# Altium PCB KBUS_to_TTL.PcbDoc
Units mil, origin at the board's own origin, x right, y up, seen from the top; angles counter-clockwise.
Board outline 6000 x 4000 mil, 2 copper layers (Top Layer, Bottom Layer); 35 components, 23 nets, 179 pads, 0 vias.
Unrouted connection lines stored in the file: 62.
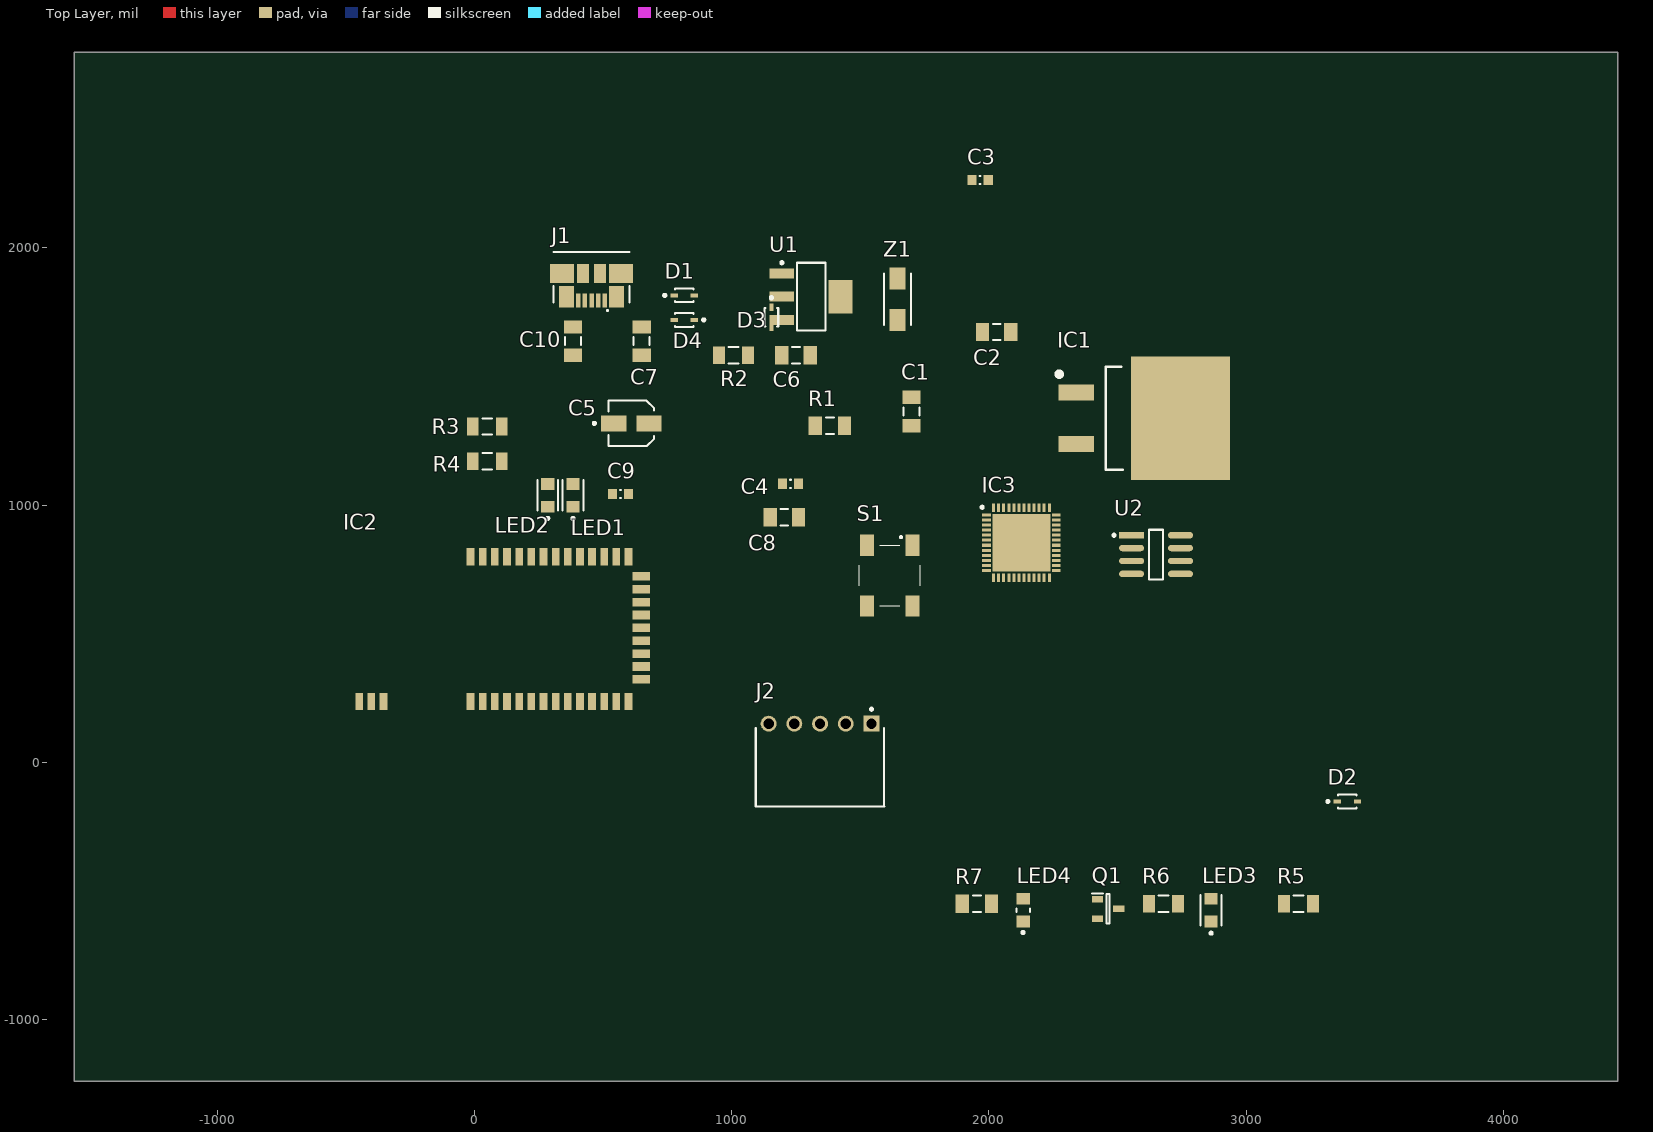
[diagram p0: Top Layer view]
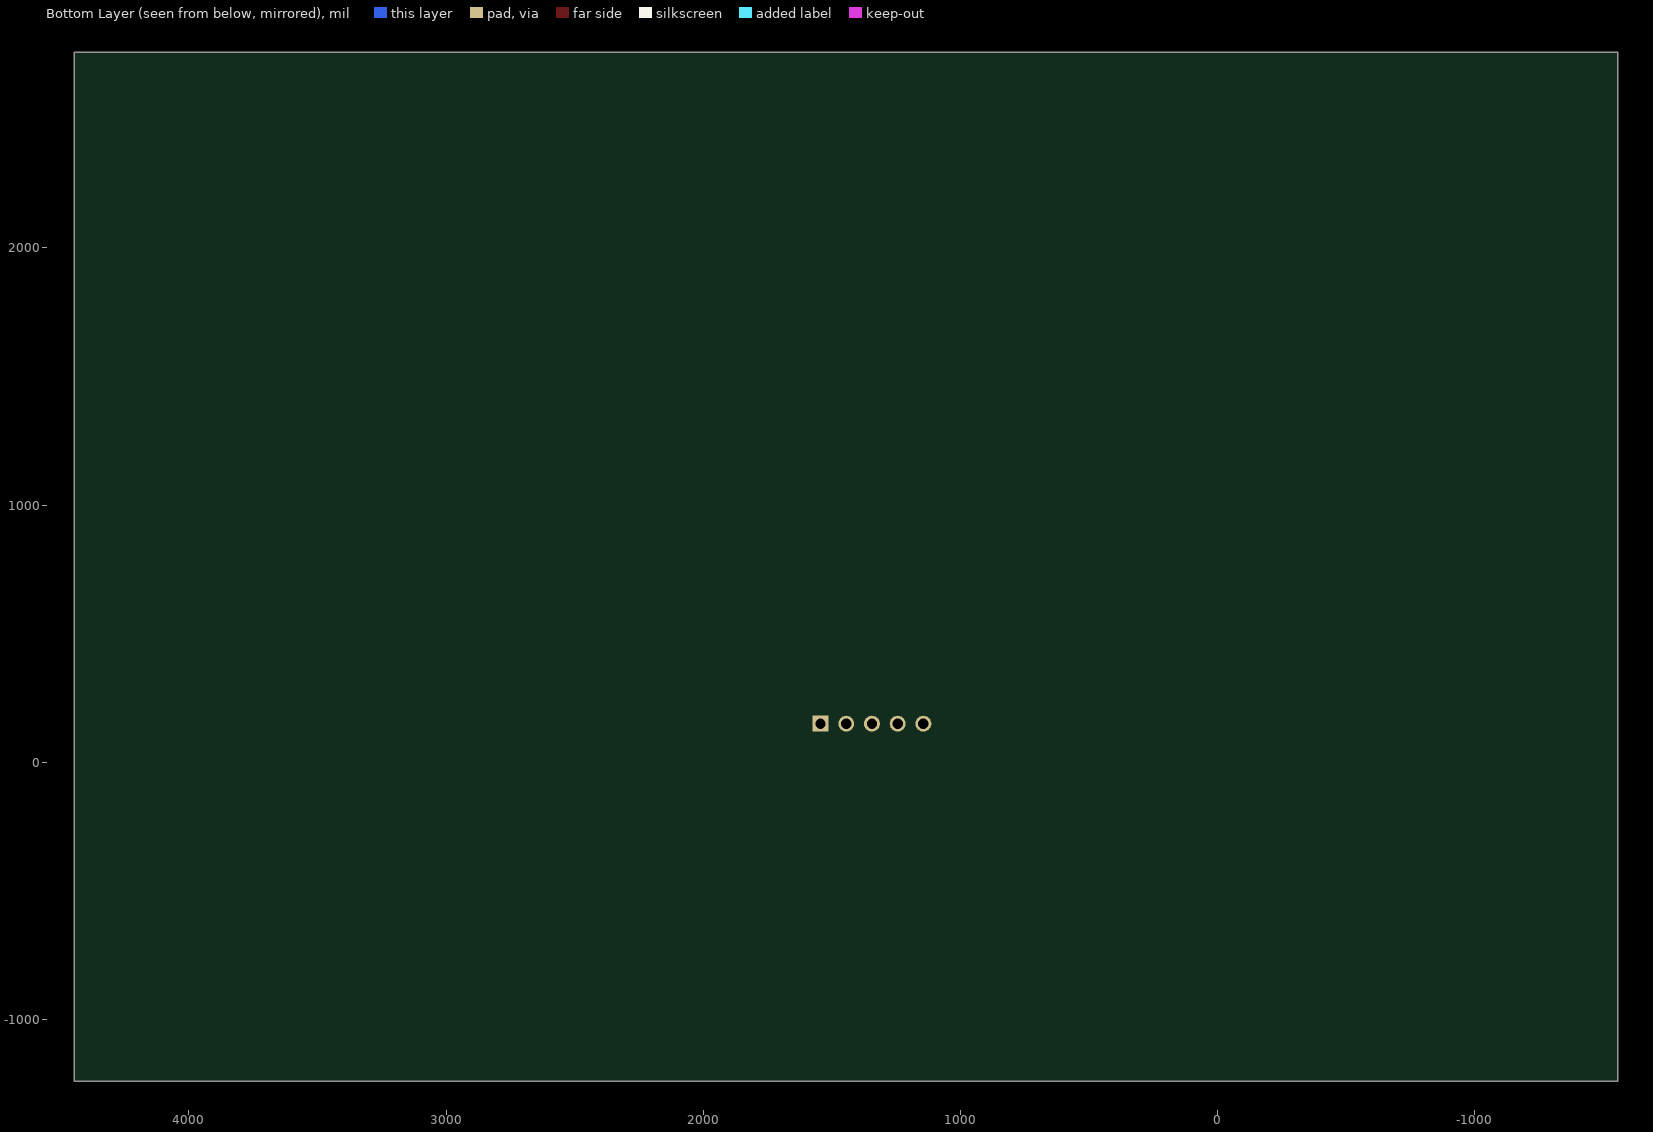
[diagram p1: Bottom Layer view, seen from below]

## Layer stack, top to bottom
Top Solder: solder mask 0.4, Solder Resist, Dk 3.5
Top Layer: signal copper 1.4
Dielectric 1: dielectric 12.6, FR-4, Dk 4.8
Bottom Layer: signal copper 1.4
Bottom Solder: solder mask 0.4, Solder Resist, Dk 3.5

## Board outline
-1555,-1240 4445,-1240 4445,2760 -1555,2760

## Design rules (kind name [scope] priority, off if disabled: settings)
Clearance [All] p1: gap=1 ignorepadtopadclearanceinfootprint=FALSE except(0: Via-Hole Fill-Hole Poly-Hole Region-Hole Text-Hole)
MinimumSolderMaskSliver [All] p1: minsoldermaskwidth=1
PasteMaskExpansion [All] p1: expansion=-0.1
PolygonConnect [All] p1: connectstyle=Relief reliefconductorwidth=10 reliefentries=4 polygonreliefangle="90 Angle" airgapwidth=10
RoomDefinition KBUS_to_TTL [InComponentClass('KBUS_to_TTL')] p1: confinementstyle=ConfineIn formatcopy=TRUE lockcomponents=FALSE outline -1539.57,-1252.51 4430.43,-1252.51 4430.43,2767.49 -1539.57,2767.49
RoutingVias [All] p1: holewidth=28 width=50 viastyle="Through Hole" minholewidth=28 minwidth=50 maxholewidth=28 maxwidth=50
SilkToSolderMaskClearance [IsPad] p1: minsilkscreentomaskgap=1 clearancetoexposedcopper=TRUE
SolderMaskExpansion [All] p1: expansion=4 istentingtop=FALSE
Width [All] p1: maxlimit=1 minlimit=0.2 preferedwidth=0.3 minimp=50.000000 maximp=50.000000 favimp=50.000000
27 further rules are at their usual default settings.

## Classes and differential pairs
component class KBUS_to_TTL: C1 C2 C4 C5 C6 C7 C8 C9 C10 D1 D4 IC1 IC2 IC3 J1 LED1 LED2 LED3 LED4 Q1 R1 R2 R3 R4 R5 R6 R7 S1 U1 U2 Z1

## Components (designator, comment, footprint, x,y, rotation, side; value= is the part's Value field where it differs from the comment)
C1 "330nF" KEMET_C1206C-EB_IPC_B 1699.61,1363.46 r90 top
C2 "100nF" KEMET_C1206C-EB_IPC_B 2030.58,1672.49 r0 top
C3 "10uF" CAPC1608N 1966.5,2263.38 r0 top
C4 "10uF" CAPC1608N 1228.94,1082.49 r0 top
C5 "1uF" Panasonic_SB_MFG 610.43,1317.49 r0 top
C6 "100nF" KEMET_C1206C-EB_IPC_B 1250.58,1582.34 r0 top
C7 "100nF" KEMET_C1206C-EB_IPC_B 650.43,1637.49 r90 top
C8 "100nF" KEMET_C1206C-EB_IPC_B 1205.28,952.49 r0 top
C9 "10uF" CAPC1608N 568.03,1042.49 r0 top
C10 "100nF" KEMET_C1206C-EB_IPC_B 383.8,1637.49 r90 top
D1 "1N4148" Diodes_Inc._SOD323F_MFG 816.14,1815 r0 top
D2 "1N4148" Diodes_Inc._SOD323F_MFG 3393.74,-152.49 r0 top
D3 "1N4148" Diodes_Inc._SOD323F_MFG 1155,1730 r270 top
D4 "1N4148" Diodes_Inc._SOD323F_MFG 816.14,1719.45 r180 top
IC1 "L7805ABD2T-TR" D2PAK-STB35NF10T4 2455.24,1136.7 r180 top
IC2 "BM20SPKA1NBC-0001AA" BM20SPKA1NBC0001AA 91.66,517.77 r90 top
IC3 "STM32G0 Modified" QFN50P700X700X60-49N-D 2127.01,853.54 r0 top
J1 "47346-0001" 47346-0001 455.81,1984.37 r0 top
J2 "SWD" Tyco_640455-5_0 1344.17,-20 r180 top
LED1 "5988170107F" Dialight_0_MFG 383.8,1037.49 r90 top
LED2 "5988170107F" Dialight_0_MFG 285.43,1037.49 r90 top
LED3 "POWER LED GREEN" Dialight_0_MFG 2864.17,-575 r90 top
LED4 "ERROR LED RED" Dialight_598_0 2134.17,-575 r90 top
Q1 "BSN20-7" SOT96P240X110-3N 2464.17,-570 r0 top
R1 "100R" RESC3216N 1382.52,1308.32 r0 top
R2 "510R" Vishay_CRCW1206-e3_IPC_B 1007.68,1582.34 r0 top
R3 "510R" Vishay_CRCW1206-e3_IPC_B 50.32,1305.71 r0 top
R4 "510R" Vishay_CRCW1206-e3_IPC_B 50.32,1170 r0 top
R5 "510R" Vishay_CRCW1206-e3_IPC_B 3204.17,-550 r0 top
R6 "510R" Vishay_CRCW1206-e3_IPC_B 2679.17,-550 r0 top
R7 "1M" RESC3216N 1954.17,-550 r0 top
S1 "LL3301AF065QJ" LL3301FF065QJ 1615.43,725.59 r270 top
U1 "LM1117MP-3.3/NOPB" MP04A_N 1309.61,1810 r0 top
U2 "E-L9637D013TR" STMicroelectronics_SO8-0016023_IPC_A 2650.31,807.49 r0 top
Z1 "SML4747AHE3_A_H" DIONM5127X229N 1645.43,1800.16 r90 top

## Footprints (in the part's own frame and the unit in brackets; to place one, negate y for a bottom-side part, rotate by r counter-clockwise, add the part's x,y. Pads: shape width x height; smd on the part's side, far side on the other; paste and mask are expansions set on the pad)
47346-0001 [mm]
  rect 0.45x1.38 smd: 1(1.3,-4.81) 2(0.65,-4.81) 3(0,-4.81) 4(-0.65,-4.81) 5(-1.3,-4.81)
  rect 1.475x2.1 smd: 6(-2.452,-4.45) 7(2.452,-4.45)
  rect 1.175x1.9 smd: 8(0.837,-2.15) 9(-0.837,-2.15)
  rect 2.375x1.9 smd: 10(2.913,-2.15) 11(-2.913,-2.15)
  silkscreen extent -3.75,-5.84 3.75,0, body extent -3.9,-5 3.9,0, height 2.66
BM20SPKA1NBC0001AA [mil]
  rect 66.93x29.92 smd: 1(-281.5,106.3) 2(-281.5,59.06) 3(-281.5,11.81) 4(-281.5,-35.43) 5(-281.5,-82.68) 6(-281.5,-129.92) 7(-281.5,-177.17) 8(-281.5,-224.41) 9(-281.5,-271.65) 10(-281.5,-318.9) 11(-281.5,-366.14) 12(-281.5,-413.39) 13(-281.5,-460.63) 14(-281.5,-507.87) 24(281.5,-507.87) 25(281.5,-460.63) 26(281.5,-413.39) 27(281.5,-366.14) 28(281.5,-318.9) 29(281.5,-271.65) 30(281.5,-224.41) 31(281.5,-177.17) 32(281.5,-129.92) 33(281.5,-82.68) 34(281.5,-35.43) 35(281.5,11.81) 36(281.5,59.06) 37(281.5,106.3) 38(-281.5,539.37) 39(-281.5,492.13) 40(-281.5,444.88)
  rect 33.46x66.93 smd: 15(-195.28,-557.09) 16(-145.28,-557.09) 17(-95.28,-557.09) 18(-45.28,-557.09) 19(4.72,-557.09) 20(54.72,-557.09) 21(104.72,-557.09) 22(154.72,-557.09) 23(204.72,-557.09)
  body extent -295,-571 295,571, height 102
CAPC1608N [mm] "Chip Capacitor, Body 1.6x0.8mm, Height 0.55mm, IPC Medium Density"
  rect 0.9x1 smd: 1(-0.8,0) 2(0.8,0)
  silkscreen extent -0.05,-0.4 0.05,0.4, body extent -0.8,-0.4 0.8,0.4, height 0.54
D2PAK-STB35NF10T4 [mm]
  rect 3.5x1.6 smd: 1(2.904,-7.64) 3(2.904,-2.56)
  rect 9.75x12.2 smd: 4(-7.371,-5.1)
  silkscreen extent -1.64,-10.2 4.82,0, body extent -11.64,-10.28 4.25,0.08, height 4.6
Dialight_0_MFG [mm]
  rect 1.15x1.3 smd paste+0 mask+0: 1(-1.125,0) 2(1.125,0)
  silkscreen extent -2.4,-1.02 1.5,1.02, body extent -1.8,-0.77 1.8,0.77, height 0.25
Dialight_598_0 [mm]
  rect 1.15x1.3 smd paste+0 mask+0: 1(-1.125,0) 2(1.125,0)
  silkscreen extent -2.32,-0.67 0.18,0.67, body extent -1.8,-0.77 1.8,0.77, height 0.25
Diodes_Inc._SOD323F_MFG [mm]
  rect 0.71x0.403 smd paste+0 mask+0: 1(-0.995,0) 2(0.995,0)
  silkscreen extent -2.05,-0.67 0.9,0.67, body extent -1.45,-0.77 1.45,0.77, height 0.25
DIONM5127X229N [mm]
  rect 2.2x1.55 smd: 1(-2.05,0) 2(2.05,0)
  silkscreen extent -2.55,-1.33 2.55,1.33, body extent -2.55,-1.33 2.55,1.33, height 2.29
KEMET_C1206C-EB_IPC_B [mil]
  rect 51.36x71.11 smd paste+0 mask+0: 1(-55.15,0) 2(55.15,0)
  silkscreen extent -15,-31 15,31, body extent -91,-45 91,45, height 10
LL3301FF065QJ [mm]
  rect 2.1x1.4 smd: 1(-3,2.25) 2(3,2.25) 3(-3,-2.25) 4(3,-2.25)
  silkscreen extent -3.9,-3 3,3, body extent -3.3,-3 3.3,3, height 5.3
MP04A_N [mm] "SOT223, 4-Leads, Body 6.5x3.5mm, Pitch 2.3mm, Lead Span 7mm, IPC Medium Density"
  rect 2.4x1 smd: 1(-2.9,2.3) 2(-2.9,0) 3(-2.9,-2.3)
  rect 2.4x3.3 smd: 4(2.9,0)
  silkscreen extent -3.02,-3.35 1.4,3.47, body extent -1.86,-3.35 1.86,3.35, height 1.8
Panasonic_SB_MFG [mm]
  rect 2.5x1.6 smd paste+0 mask+0: 1(-1.75,0) 2(1.75,0)
  silkscreen extent -3.77,-2.25 2.25,2.25, body extent -3.25,-2.5 3.25,2.5, height 0.25
QFN50P700X700X60-49N-D [mm]
  rect 0.85x0.3 smd: 1(-3.45,2.75) 2(-3.45,2.25) 3(-3.45,1.75) 4(-3.45,1.25) 5(-3.45,0.75) 6(-3.45,0.25) 7(-3.45,-0.25) 8(-3.45,-0.75) 9(-3.45,-1.25) 10(-3.45,-1.75) 11(-3.45,-2.25) 12(-3.45,-2.75) 25(3.45,-2.75) 26(3.45,-2.25) 27(3.45,-1.75) 28(3.45,-1.25) 29(3.45,-0.75) 30(3.45,-0.25) 31(3.45,0.25) 32(3.45,0.75) 33(3.45,1.25) 34(3.45,1.75) 35(3.45,2.25) 36(3.45,2.75)
  rect 0.3x0.85 smd: 13(-2.75,-3.45) 14(-2.25,-3.45) 15(-1.75,-3.45) 16(-1.25,-3.45) 17(-0.75,-3.45) 18(-0.25,-3.45) 19(0.25,-3.45) 20(0.75,-3.45) 21(1.25,-3.45) 22(1.75,-3.45) 23(2.25,-3.45) 24(2.75,-3.45) 37(2.75,3.45) 38(2.25,3.45) 39(1.75,3.45) 40(1.25,3.45) 41(0.75,3.45) 42(0.25,3.45) 43(-0.25,3.45) 44(-0.75,3.45) 45(-1.25,3.45) 46(-1.75,3.45) 47(-2.25,3.45) 48(-2.75,3.45)
  rect 5.7x5.7 smd: 49(0,0)
  silkscreen extent -4,3.38 -3.75,3.62, body extent -3.55,-3.55 3.55,3.55, height 0.6
RESC3216N [mm] "Chip Resistor, Body 3.2x1.6mm, IPC Medium Density"
  rect 1.3x1.8 smd: 1(-1.45,0) 2(1.45,0)
  silkscreen extent -0.4,-0.8 0.4,0.8, body extent -1.68,-0.87 1.68,0.87, height 0.71
SOT96P240X110-3N [mm]
  rect 1.1x0.65 smd: 1(-1.05,0.96) 2(-1.05,-0.96) 3(1.05,0)
  silkscreen extent -1.6,-1.45 0.15,1.54, body extent -1.2,-1.45 1.2,1.45, height 1.1
STMicroelectronics_SO8-0016023_IPC_A [mil]
  rect 97.4x24.49 smd paste+0 mask+0: 1(-95.12,75)
  rrect100% 97.4x24.49 smd paste+0 mask+0: 2(-95.12,25) 3(-95.12,-25) 4(-95.12,-75) 5(95.12,-75) 6(95.12,-25) 7(95.12,25) 8(95.12,75)
  silkscreen extent -168,-96 27,96, body extent -164,-116 164,116, height 10
Tyco_640455-5_0 [mm]
  rect 1.57x1.57 hole 1.02 paste-1000 mask+0: 1(-5.08,-4.32)
  round 1.57 hole 1.02 paste-1000 mask+0: 2(-2.54,-4.32) 3(0,-4.32) 4(2.54,-4.32) 5(5.08,-4.32)
  silkscreen extent -6.35,-5.87 6.35,3.88, body extent -6.52,-5.21 6.52,7.01, height 0.25
Vishay_CRCW1206-e3_IPC_B [mil]
  rect 45.51x69.22 smd paste+0 mask+0: 1(-56.14,0) 2(56.14,0)
  silkscreen extent -19,-31 19,31, body extent -89,-44 89,44, height 10

## Part data
C1: library part C1206C334K3RACTU, "Kemet C1206, 330nF, 25VDC, X7R"
C2 C6 C7 C8 C10: library part C1206C104M5RACTU, "Kemet C1206, 100nF, 50VDC, X7R"
C3 C4 C9: "CAP MLCC, 10uF, 16V, 0603 [1608 Metric], ±10%, X5R", Dielectric=X5R, Manufacturer=MURATA, Manufacturer Part Number=GRM188R61C106KAALD, Package="0603 [1608 Metric]", Supplier Part Number 1=2611923, Tolerance="± 10%", Voltage=16V, ComponentLink1Description=Datasheet, ComponentLink1URL=https://4donline.ihs.com/images/VipMasterIC/IC/MURE/MURE-S-A0004349797/MURE-S-A0004352506-1.pdf?hkey=6D3A4C79FDBF58556ACFDE234799DDF0, Mounting=SMD, Part Type=MLCC, Supplier 1=Farnell
C5: library part EEE1HA010SR, "1uF electrolytic capacitor"
D1 D2 D3 D4: library part 1N4148WSF-7
IC1: "Integrated Circuit", Manufacturer_Name=STMicroelectronics, Datasheet Link=https://www.st.com/resource/en/datasheet/l78.pdf, Manufacturer_Part_Number=L7805ABD2T-TR
IC2: "Bluetooth Module, Class 2, BLE 5.0", Manufacturer=Microchip, Supplier Part Number=3580727, ComponentLink1Description=Datasheet, ComponentLink1URL=https://4donline.ihs.com/images/VipMasterIC/IC/MCHP/MCHP-S-A0008919503/MCHP-S-A0008920188-1.pdf?hkey=6D3A4C79FDBF58556ACFDE234799DDF0, Manufacturer Part Number=BM20SPKA1NBC-0001AA, Mounting=SMD, Supplier 1=Farnell
IC3: "Integrated Circuit", Manufacturer=STMicroelectronics, Manufacturer Part Number=STM32G071CBU6, Supplier Part Number=511-STM32G071CBU6, ComponentLink1Description=Datasheet, ComponentLink1URL=https://www.mouser.co.uk/datasheet/2/389/dm00412180-1799303.pdf, Supplier 1=Mouser
J1: "Connector", Manufacturer_Name=Molex, Mouser Part Number=538-47346-0001, Datasheet Link=http://www.molex.com/pdm_docs/sd/473460001_sd.pdf, Manufacturer_Part_Number=47346-0001, Mouser Price/Stock=https://www.mouser.co.uk/ProductDetail/Molex/47346-0001?qs=c2CV6XM0DweJBWaSeyWeCw%3D%3D
J2: library part 640455-5, "ST-LINK"
LED1 LED2: "Green LED", Manufacturer=DIALIGHT, Supplier Part Number=1465996, ComponentLink1Description=Datasheet, ComponentLink1URL=https://www.farnell.com/datasheets/1484480.pdf, Manufacturer Part Number=5988170107F, Mounting=SMD, Supplier 1=Farnell
LED3: library part 5988170107F, "Green LED", Manufacturer=DIALIGHT, Supplier Part Number=1465996, ComponentLink1Description=Datasheet, ComponentLink1URL=https://www.farnell.com/datasheets/1484480.pdf, Manufacturer Part Number=5988170107F, Mounting=SMD, Supplier 1=Farnell
LED4: library part 598-8110-107F, "Red LED", Manufacturer=DIALIGHT, Manufacturer Part Number=5988110107F, Supplier Part Number=1465992, ComponentLink1Description=Datasheet, ComponentLink1URL=https://www.farnell.com/datasheets/1484480.pdf, Mounting=SMD, Supplier 1=Farnell
Q1: "MOSFET (N-Channel)", Manufacturer="DIODES INC", Supplier Part Number=621-BSN20-7, ComponentLink1Description=Datasheet, ComponentLink1URL=https://www.diodes.com/assets/Datasheets/ds31898.pdf, Manufacturer Part Number=BSN20-7, Mounting=SMD, Supplier 1=Mouser
R1: "RES 100R, ±1%, 250mW, 200V, 1206 [3216 Metric], Thick Film", Manufacturer=YAGEO, Manufacturer Part Number=RC1206FR-07100RL, Package="1206 [3216 Metric]", Power=250mW, Supplier Part Number 1=9240888, Temperature Coefficient="± 100ppm/°C", Tolerance="± 1%", Voltage=200V, ComponentLink1Description=Datasheet, ComponentLink1URL=http://www.farnell.com/datasheets/2167052.pdf, Mounting=SMD, Part Type="Thick Film", Supplier 1=Farnell
R2 R3 R4 R5 R6: library part CRCW1206510RJNEA, "Resistor 1206, 510ohm, 5%, 1/4W"
R7: "RES 1M, ±0,1%, 125mW, 150V, 1206 [3216 Metric], Thin Film", Manufacturer="MULTICOMP PRO", Manufacturer Part Number=MC009412, Package="1206 [3216 Metric]", Power=125mW, Supplier Part Number 1=2988394, Tolerance="± 0,1%", Voltage=150V, ComponentLink1Description=Datasheet, ComponentLink1URL=https://www.farnell.com/datasheets/2861105.pdf, Mounting=SMD, Part Type="Thin Film", Supplier 1=Farnell
S1: "Switch", Manufacturer_Name=E-Switch, Datasheet Link=https://media.digikey.com/pdf/Data%20Sheets/E-Switch%20PDFs/LL3301AF065QJ.pdf, Height=7.3mm, Manufacturer_Part_Number=LL3301AF065QJ
U1: "800mA Low-Dropout Linear Regulator, 4-pin SOT-223, Pb-Free", Manufacturer="National Semiconductor", PackageTopMarking=XYTT*N05A, PowerWise=N, Code_IPC=SOT223-4, Code_JEDEC=TO-261-AA, ComponentLink1Description="LM1117 Datasheet", ComponentLink1URL=http://www.national.com/ds/LM/LM1117.pdf, ComponentLink2Description="LM1117 Web Page", ComponentLink2URL=http://www.national.com/pf/LM/LM1117.html, ComponentLink3Description="MP04A Package Page", ComponentLink3URL=http://www.national.com/packaging/folders/mp04a.html, CompType="LDO IC", DatasheetVersion=Apr-2006, PackageDescription="Molded SOT-223, 6.50 x 3.56 x 1.6mm Body, 4 Lead, 2.3mm Pitch", PackageReference=MP04A, PackageVersion="revB, Apr-2003", PartNumber=LM1117MP-3.3/NOPB, PinCount=4, RevisionNote="Component URLs added", RoHS=Y
U2: "Bidirectional Serial Communication in Automotive Diagnostic System", Manufacturer=STMicroelectronics, Supplier Part Number=3130050, ComponentLink1Description=Datasheet, ComponentLink1URL=https://www.farnell.com/datasheets/2815827.pdf, Manufacturer Part Number=E-L9637D013TR, Mounting=SMD, Supplier 1=Farnell
Z1: "Zener Diode", Manufacturer=Vishay, Manufacturer Part Number=SML4747AHE3_A/H, Supplier Part Number=3818758, Voltage=20V, ComponentLink1Description=Datasheet, ComponentLink1URL=https://4donline.ihs.com/images/VipMasterIC/IC/VISH/VISH-S-A0012939441/VISH-S-A0013145027-1.pdf?hkey=6D3A4C79FDBF58556ACFDE234799DDF0, Supplier 1=Farnell

## Nets (pads, with @x,y where several pads share a name; then routed paths per layer and width w, separated by ;. In a path a pad name is that pad's centre, name@x,y a point inside that pad or via, vN(x,y) a via of type N, cw(c..) or ccw(c..) an arc to the next point about the centre after c; other vN are vias at no path point)
+3.3V: C9.2 D2.1 IC2.21 IC3.6 J2.4 R5.1 R6.1
+5V: C2.1 C3.1 D1.1 D4.1 IC1.3 U1.3
+12V: C1.1 IC1.1 R1.2
GND: C1.2 C2.2 C3.2 C4.2 C5.1 C6.2 C7.2 C8.2 C9.1 C10.2 IC1.4 IC2.23 IC2.37 IC3.7 J1.5 J2.3 LED3.1 Q1.2 R7.2 S1.1 U2.5 Z1.2
I-BUS: C7.1 R2.1 U2.6
"IBUS RX": IC3.32 U2.1
"IBUS TX": IC3.29 U2.4
NetC4_1: C4.1 D2.2 U1.2 U1.4
NetC5_2: C5.2 C6.1 D3.1 R2.2
NetD1_2: D1.2 J1.1
NetD3_2: D3.2 R1.1 Z1.1
NetIC2_27: IC2.27 LED1.1
NetIC2_28: IC2.28 LED2.1
NetIC3_16: IC3.16 Q1.1 R7.1
NetLED1_2: LED1.2 R3.1
NetLED2_2: LED2.2 R4.1
NetLED3_2: LED3.2 R5.2
NetLED4_1: LED4.1 Q1.3
NetLED4_2: LED4.2 R6.2
RST: C10.1 IC3.10 J2.5
SWCLK: IC3.36 J2.1
SWDIO: IC3.35 J2.2
"SYS PWR": IC2.24 R3.2 R4.2
pads on no net: C8.1 D4.2 IC2.1 IC2.2 IC2.3 IC2.4 IC2.5 IC2.6 IC2.7 IC2.8 IC2.9 IC2.10 IC2.11 IC2.12 IC2.13 IC2.14 IC2.15 IC2.16 IC2.17 IC2.18 IC2.19 IC2.20 IC2.22 IC2.25 IC2.26 IC2.29 IC2.30 IC2.31 IC2.32 IC2.33 IC2.34 IC2.35 IC2.36 IC2.38 IC2.39 IC2.40 IC3.1 IC3.2 IC3.3 IC3.4 IC3.5 IC3.8 IC3.9 IC3.11 IC3.12 IC3.13 IC3.14 IC3.15 IC3.17 IC3.18 IC3.19 IC3.20 IC3.21 IC3.22 IC3.23 IC3.24 IC3.25 IC3.26 IC3.27 IC3.28 IC3.30 IC3.31 IC3.33 IC3.34 IC3.37 IC3.38 IC3.39 IC3.40 IC3.41 IC3.42 IC3.43 IC3.44 IC3.45 IC3.46 IC3.47 IC3.48 IC3.49 J1.2 J1.3 J1.4 J1.6 J1.7 J1.8 J1.9 J1.10 J1.11 S1.2 S1.3 S1.4 U1.1 U2.2 U2.3 U2.7 U2.8